# Altium PCB USB-C Power.PcbDoc
Units mil, origin at the board's own origin, x right, y up, seen from the top; angles counter-clockwise.
Board outline 1025 x 575 mil, 2 copper layers (Top Layer, Bottom Layer); 39 components, 19 nets, 112 pads, 66 vias.
Unrouted connection lines stored in the file: 4.
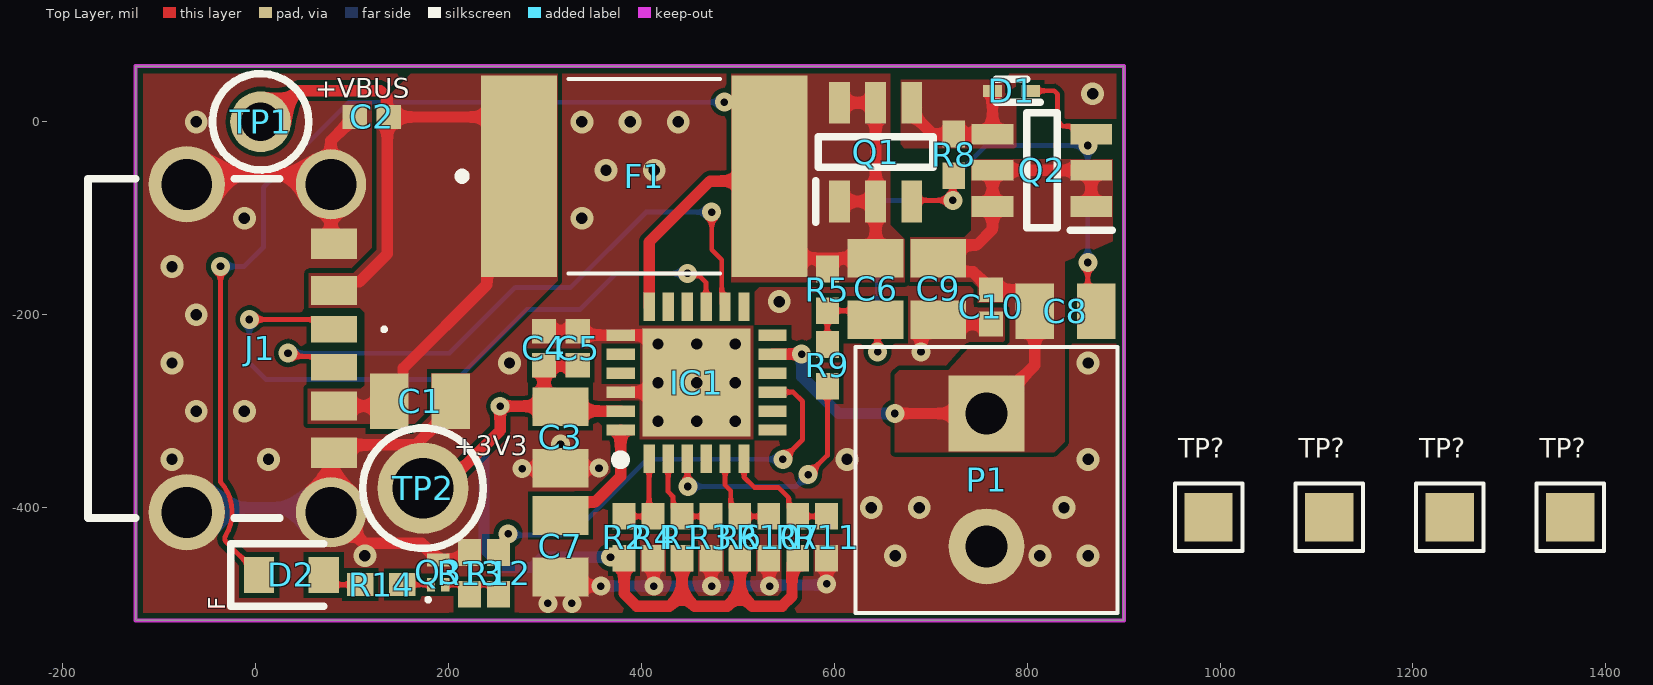
[diagram p0: Top Layer view]
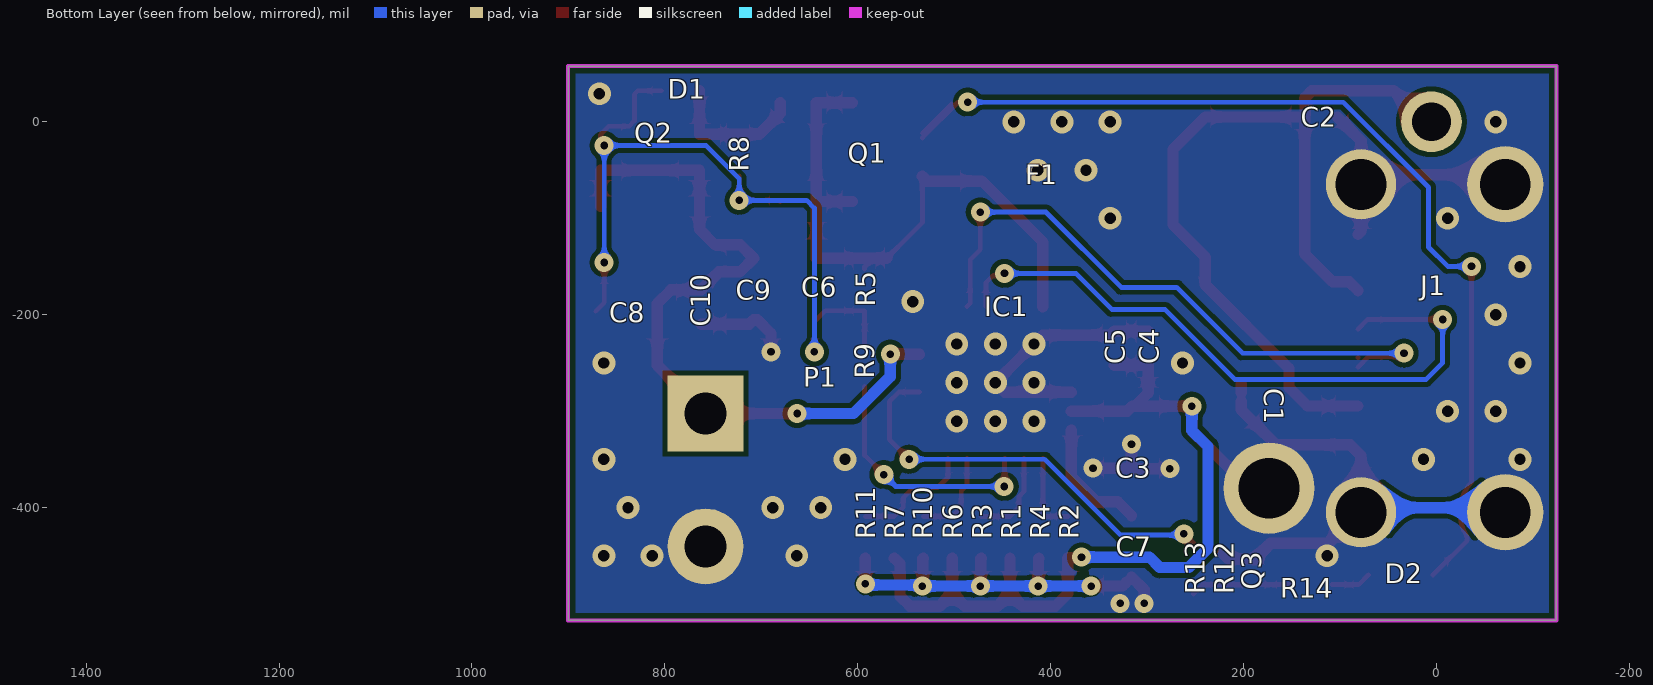
[diagram p1: Bottom Layer view, seen from below]

## Layer stack, top to bottom
Top Solder: solder mask 0.4, Solder Resist, Dk 3.5
Top Layer: signal copper 1.4
Dielectric 1: dielectric 12.6, FR-4, Dk 4.8
Bottom Layer: signal copper 1.4
Bottom Solder: solder mask 0.4, Solder Resist, Dk 3.5

## Board outline
-124.6,-517.17 -124.6,57.83 900.4,57.83 900.4,-517.17

## Design rules (kind name [scope] priority, off if disabled: settings)
BoardOutlineClearance [All] p1: gap=7.87 ignorepadtopadclearanceinfootprint=FALSE
Clearance [All] p1: gap=5 ignorepadtopadclearanceinfootprint=FALSE except(9.84: Arc-Hole Track-Hole SMDPad-Hole THPad-Hole Via-Hole Fill-Hole Poly-Hole Region-Hole Text-Hole)
ComponentClearance [All] p1: gap=5 collisioncheckmode=3 verticalgap=5 showdistances=TRUE
DiffPairsRouting [All] p1: maxlimit=10 minlimit=5 mostfreqgap=5 toplayer_minwidth=5 toplayer_maxwidth=1000 toplayer_prefwidth=5 bottomlayer_minwidth=5 bottomlayer_maxwidth=1000 bottomlayer_prefwidth=5 maxuncoupledlength=500
Height [All] p1: minheight=0 maxheight=71497.94 prefheight=500
HoleSize [All] p1: absolutevalues=TRUE maxlimit=248.03 minlimit=7.87 maxpercent=80.000 minpercent=20.000
HoleToHoleClearance [All] p1: gap=9.84 allowstackedmicrovias=FALSE
MinimumAnnularRing [All] p1: minimumring=5.12
MinimumSolderMaskSliver [All] p1: minsoldermaskwidth=0
PlaneClearance [All] p1: clearance=5
PlaneConnect PlaneConnectPowerPads [InNet('+VBUS') Or InNet('+5V') Or InNet('+3V3') Or InNet('GND') Or InNet('+VBUS_F') Or InNet('POWER_MOS_DS') Or InNet('+V_out')] p1: planeconnectstyle=Direct reliefexpansion=20 reliefentries=4 reliefconductorwidth=10 reliefairgap=10
PlaneConnect [All] p2: pad.planeconnectstyle=Relief pad.reliefexpansion=11.81 pad.reliefentries=4 pad.reliefconductorwidth=5 pad.reliefairgap=5 via.planeconnectstyle=Direct via.reliefexpansion=11.81 via.reliefentries=4 via.reliefconductorwidth=5 via.reliefairgap=5
PolygonConnect PolygonConnectPowerPads [InNet('+VBUS') Or InNet('+5V') Or InNet('+3V3') Or InNet('GND') Or InNet('+VBUS_F') Or InNet('POWER_MOS_DS') Or InNet('+V_out')] p1: connectstyle=Direct reliefconductorwidth=10 reliefentries=4 polygonreliefangle="90 Angle" airgapwidth=10
PolygonConnect [All] p2: thpad.connectstyle=Relief thpad.reliefconductorwidth=5 thpad.reliefentries=4 thpad.polygonreliefangle="90 Angle" thpad.airgapwidth=5 smdpad.connectstyle=Relief smdpad.reliefconductorwidth=5 smdpad.reliefentries=4 smdpad.polygonreliefangle="90 Angle" smdpad.airgapwidth=5 via.connectstyle=Direct via.reliefconductorwidth=5 via.reliefentries=4 via.polygonreliefangle="90 Angle" via.airgapwidth=5
RoutingVias [All] p1: holewidth=11.81 width=23.62 viastyle="Through Hole" minholewidth=7.87 minwidth=13.78 maxholewidth=23.62 maxwidth=259.84
SilkToSilkClearance [All] p1: silktosilkclearance=0
SilkToSolderMaskClearance [IsPad] p1: minsilkscreentomaskgap=5.91 clearancetoexposedcopper=TRUE
SolderMaskExpansion [All] p1: expansion=2.95 istentingtop=FALSE
Width [All] p1: maxlimit=1000 minlimit=5 preferedwidth=5 minimp=50.000000 maximp=50.000000 favimp=50.000000
20 further rules are at their usual default settings.

## Classes and differential pairs
component class "USB-C Power": C1 C2 C3 C4 C5 C6 C7 C8 C9 C10 D1 D2 F1 IC1 J1 P1 Q1 Q2 Q3 R1 R2 R3 R4 R5 R6 R7 R8 R9 R10 R11 R12 R13 R14 TP1 TP2 TP?

## Components (designator, comment, footprint, x,y, rotation, side; value= is the part's Value field where it differs from the comment)
C1 "10u/25V" 0805_CAP 115.4,-254.88 r0 top
C2 "100n/50V" 0402_CAP 150.28,-15 r180 top
C3 "1u/25V" 0805_CAP 350.99,-272.36 r270 top
C4 "100n/50V" 0402_CAP 278.83,-264.84 r90 top
C5 "100n/50V" 0402_CAP 313.83,-264.84 r90 top
C6 "1u/25V" 0805_CAP 677.84,-118.36 r270 top
C7 "1u/25V" 0805_CAP 280.99,-495.28 r90 top
C8 "1u/25V" 0805_CAP 784.74,-161.47 r0 top
C9 "10u/25V" 0805_Cap 742.84,-118.36 r270 top
C10 "100n/50V" 0402_CAP 782.38,-162.07 r270 top
D1 "22V/100mW" SOD-923-2 783.75,32.12 r180 top
D2 "Yellow/54mW" 0603_LED -28.14,-435 r0 top
F1 "24V/7A" 2920_PTC 402.92,-56.47 r0 top locked
IC1 "CYPD3177-24LQXQT" QFN-24 457.13,-270.47 r90 top
J1 "Type-C Power Header" TYPE-C_6_FEMALE 78,-64.84 r270 top locked
P1 "V_Output" KF350-2P 757.84,-371.47 r180 top locked
Q1 "40V/6.9A" TSOP-6 642.84,-31.47 r90 top
Q2 "40V/6.9A" TSOP-6 815.25,-50.29 r180 top
Q3 "TNM3K60FE" CST3-3 189.18,-467.2 r0 top
R1 "5.1K/62.5mW" 0402_RES 421.98,-475.87 r90 top
R2 "5.1K/62.5mW" 0402_RES 361.98,-475.87 r90 top
R3 "10K/62.5mW" 0402_RES 491.98,-385.87 r270 top
R4 "2.4K/62.5mW" 0402_RES 431.98,-385.87 r270 top
R5 "10K/62.5mW" 0402_RES 612.84,-129.3 r270 top
R6 "0R" 0402_RES 481.98,-475.87 r90 top
R7 "0R" 0402_RES 541.98,-475.87 r90 top
R8 "49.9K/62.5mW" 0402_RES 703.84,-79.3 r90 top
R9 "1K/62.5mW" 0402_RES 572.85,-297.61 r90 top
R10 "DNP" 0402_RES 551.98,-385.87 r270 top
R11 "DNP" 0402_RES 611.98,-385.87 r270 top
R12 "1K/62.5mW" 0402_RES 271.66,-423.35 r270 top
R13 "150K/62.5mW" 0402_Res 201.66,-513.35 r90 top
R14 "150K/62.5mW" 0402_Res 175.05,-500 r180 top
TP1 "Red/Small" TestPoint_small 5,0 r0 top
TP2 "white/Small" TestPoint_big 173.47,-380 r0 top
TP? "SMD_Point" TestPoint_SMD 1238.17,-410.14 r0 top
TP? "SMD_Point" TestPoint_SMD 1113.17,-410.14 r0 top
TP? "SMD_Point" TestPoint_SMD 1363.17,-410.14 r0 top
TP? "SMD_Point" TestPoint_SMD 988.17,-410.14 r0 top

## Footprints (in the part's own frame and the unit in brackets; to place one, negate y for a bottom-side part, rotate by r counter-clockwise, add the part's x,y. Pads: shape width x height; smd on the part's side, far side on the other; paste and mask are expansions set on the pad)
0402_CAP [mm]
  rect 0.65x0.64 smd: 1(0.312,-0.508) 2(1.212,-0.508)
  body extent 0.26,-0.76 1.26,-0.26, height 0.56
0402_RES [mm]
  rect 0.7x0.6 smd: 1(0.593,-0.508) 2(1.693,-0.508)
  body extent 0.64,-0.76 1.64,-0.26, height 0.35
0402_Res [mm]
  rect 0.7x0.6 smd: 1(0.593,-0.508) 2(1.693,-0.508)
  body extent 0.64,-0.76 1.64,-0.26, height 0.35
0603_LED [mm]
  rect 0.8x0.95 smd: 1(0.801,-0.889) 2(2.501,-0.889)
  silkscreen extent 0.05,-1.71 2.5,-0.06, body extent 0.83,-1.29 2.43,-0.49, height 0.58
0805_CAP [mm]
  rect 1.02x1.47 smd: 1(0.587,-0.889) 2(2.207,-0.889)
  body extent 0.39,-1.51 2.4,-0.26, height 1.52
0805_Cap [mm]
  rect 1.02x1.47 smd: 1(0.587,-0.889) 2(2.207,-0.889)
  body extent 0.39,-1.51 2.4,-0.26, height 1.52
2920_PTC [mm]
  rect 2x5.3 smd: 1(-3.3,0) 2(3.3,0)
  silkscreen extent -4.9,-2.56 2,2.56, body extent -3.67,-2.57 3.67,2.57, height 2.5
CST3-3 [mm]
  rect 0.22x0.35 smd: 1(-0.19,-0.325) 2(0.19,-0.325)
  rect 0.6x0.35 smd: 3(0,0.325)
  silkscreen extent -0.32,-0.77 -0.22,-0.67, body extent -0.3,-0.5 0.3,0.5, height 0.5
KF350-2P [mm]
  rect 2x2 hole 1.1: 1(0,-1.75)
  round 2 hole 1.1: 2(0,1.75)
  silkscreen extent -3.45,-3.5 3.45,3.5, body extent -3.37,-3.65 3.43,3.65, height 8.41
QFN-24 [mm]
  rect 0.75x0.3 smd: 1(-2,1.25) 2(-2,0.75) 3(-2,0.25) 4(-2,-0.25) 5(-2,-0.75) 6(-2,-1.25) 13(2,-1.25) 14(2,-0.75) 15(2,-0.25) 16(2,0.25) 17(2,0.75) 18(2,1.25)
  rect 0.3x0.75 smd: 7(-1.25,-2) 8(-0.75,-2) 9(-0.25,-2) 10(0.25,-2) 11(0.75,-2) 12(1.25,-2) 19(1.25,2) 20(0.75,2) 21(0.25,2) 22(-0.25,2) 23(-0.75,2) 24(-1.25,2)
  rect 2.85x2.85 smd: 25(0,0)
  silkscreen extent -2.16,1.88 -1.91,2.13, body extent -2.05,-2.05 2.05,2.05, height 0.6
SOD-923-2 [mm]
  rect 0.51x0.32 smd: 1(-0.5,0) 2(0.5,0)
  silkscreen extent -0.76,-0.3 0.4,0.3, body extent -0.5,-0.3 0.5,0.3, height 0.4
TestPoint_big [mm] "Length: 11.3 mm Outside Diameter: 3.17 mm"
  round 2.4 hole 1.6: 1(0,0)
  silkscreen extent -1.59,-1.59 1.59,1.59, body extent -1.6,-1.6 1.6,1.6, height 8.13
TestPoint_small [mm] "Length: 7.62 mm Outside Diameter: 2.54 mm"
  round 1.6 hole 1.02: 1(0,0)
  silkscreen extent -1.27,-1.27 1.27,1.27, body extent -1.26,-1.27 1.27,1.27, height 4.82
TestPoint_SMD [mil] "Diameter: 1.27 mm"
  rect 50x50 smd: 1(0,0)
  silkscreen extent -35,-35 35,35
TSOP-6 [mm]
  rect 1.1x0.55 smd: 1(-1.3,0.95) 2(-1.3,0) 3(-1.3,-0.95) 4(1.3,-0.95) 5(1.3,0) 6(1.3,0.95)
  silkscreen extent -1.85,-1.51 0.4,1.58, body extent -1.42,-1.51 1.42,1.51, height 1.1
TYPE-C_6_FEMALE [mm] "5A 1 Surface Mount 6 Female -25℃~+85℃ Type-C SMD  USB Connectors ROHS"
  rect 0.7x1.2 smd: A5(3.82,0.08) B5(4.82,0.08)
  rect 0.76x1.2 smd: A9(5.84,0.08) B9(2.8,0.08)
  rect 0.8x1.2 smd: A12(7.07,0.08) B12(1.57,0.08)
  round 1.85 hole 1.34: MH(0,0) MH(8.64,0)
  round 2.01 hole 1.34: MH(0,-3.8) MH(8.64,-3.8)
  silkscreen extent -0.15,-6.4 8.79,1.45, body extent -0.15,-6.19 8.79,0.71, height 3.25

## Part data
C1 C9: library part Cap, "25V 10uF X5R - Multilayer Ceramic Capacitors MLCC - SMD/SMT ROHS", Mfr.="Murata Electronics", Mfr. #=GRM21BR61E106KA73K, Datasheet=https://jlcpcb.com/parts/2nd/Capacitors/Multilayer_Ceramic_Capacitors_MLCC_SMD_SMT_33, Distributor #=C3909351, Distributor_Link=https://jlcpcb.com/partdetail/4477883-GRM21BR61E106KA73K/C3909351
C2 C4 C5 C10: library part Cap, "16V 100nF -20%~+80% 0402  Multilayer Ceramic Capacitors MLCC - SMD/SMT ROHS", Mfr.="FH (Guangdong Fenghua Advanced Tech)", Mfr. #=0402F104Z160NT, Datasheet=https://datasheet.lcsc.com/lcsc/2202131930_FH--Guangdong-Fenghua-Advanced-Tech-0402F104Z160NT_C2838746.pdf, Distributor #=C2838746, Distributor_Link=https://jlcpcb.com/partdetail/3013916-0402F104Z160NT/C2838746
C3 C6 C7 C8: library part Cap, "25V 1uF Y5V ±20% 0805  Multilayer Ceramic Capacitors MLCC - SMD/SMT ROHS", Mfr.="FH (Guangdong Fenghua Advanced Tech)", Mfr. #=0805F105M250NT, Datasheet=https://datasheet.lcsc.com/lcsc/1810311214_FH--Guangdong-Fenghua-Advanced-Tech-0805F105M250NT_C89378.pdf, Distributor #=C89378, Distributor_Link=https://jlcpcb.com/partdetail/90558-0805F105M250NT/C89378
D1: library part Diode_Zener, "Zener Diodes CDZV22B is the 100mW type compact (1006 size) diode for voltage regulation.", Mfr.="ROHM Semiconductor", Mfr. #=CDZVT2R22B, Datasheet=https://www.rohm.com/datasheet?p=CDZV22B&dist=Mouser&media=referral&source=mouser.com&campaign=Mouser, Distributor #=755-CDZVT2R22B, Distributor_Link=https://www.mouser.tw/ProductDetail/ROHM-Semiconductor/CDZVT2R22B?qs=4v%252BiZTmLVHG6BDwFzUsoYg%3D%3D
D2: library part LED, "590nm~590nm yellow 54mW 0603  Light Emitting Diodes (LED) ROHS", Mfr.="ROHM Semicon", Mfr. #=SML-D12Y8WT86R, Datasheet=https://datasheet.lcsc.com/lcsc/2006151335_ROHM-Semicon-SML-D12Y8WT86R_C600870.pdf, Distributor #=C600870, Distributor_Link=https://jlcpcb.com/partdetail/RohmSemicon-SMLD12Y8WT86R/C600870
F1: library part PTC, "Resettable Fuses - PPTC PTC SMD RESETTABLE FUSE", Mfr.=Littelfuse, Mfr. #=2920L700/24SLER, Datasheet=https://www.mouser.tw/datasheet/2/240/littelfuse_ptc_low_rho_datasheet_pdf-2956203.pdf, Distributor #=576-2920L700/24SLER, Distributor_Link=https://www.mouser.tw/ProductDetail/Littelfuse/2920L700-24SLER?qs=7MVldsJ5UazQEVth1QGslQ%3D%3D
IC1: library part CYPD3177-24LQXQ, "USB Interface IC USB Type-C port controller CYPD3177", Mfr.="Infineon Technologies", Datasheet=https://www.mouser.tw/datasheet/2/196/Infineon_EZ_PD_BCR_Datasheet_USB_Type_C_Port_Contr-3161917.pdf, Distributor #=727-CYPD3177-24LQXQT, Distributor_Link=https://www.mouser.tw/ProductDetail/727-CYPD3177-24LQXQT, Mfr. #=CYPD3177-24LQXQT
J1: library part Type-C_6_Female, "5A 1 Surface Mount 6 Female -25℃~+85℃ Type-C SMD USB Connectors ROHS", Mfr.=DEALON, Mfr. #=USB-TYPE-C-010, Datasheet=https://datasheet.lcsc.com/lcsc/2201121330_DEALON-USB-TYPE-C-010_C2927030.pdf, Distributor #=C2927030, Distributor_Link=https://jlcpcb.com/partdetail/Dealon-USB_TYPE_C010/C2927030
P1: library part Header_2x1, "10A -40℃~+105℃ 300V Green 18~24 Straight pin 3.5mm 0.75 1 2 Plugin,P=3.5mm  Screw terminal ROHS", Mfr.="Cixi Kefa Elec", Mfr. #=KF350-3.5-2P, Datasheet=https://datasheet.lcsc.com/lcsc/2303171000_Cixi-Kefa-Elec-KF350-3-5-2P_C474892.pdf, Distributor #=C474892, Distributor_Link=https://jlcpcb.com/partdetail/Cixi_KefaElec-KF350_3_52P/C474892
Q1 Q2: library part MOSFET_P_1, "MOSFET P Ch -40Vds 20Vgs AEC-Q101 Qualified", Mfr.="Vishay Semiconductors", Mfr. #=SQ3419EV-T1_GE3, Datasheet=https://www.vishay.com/doc?68210, Distributor #=78-SQ3419EV-T1_GE3, Distributor_Link=https://www.mouser.tw/ProductDetail/Vishay-Semiconductors/SQ3419EV-T1_GE3?qs=Vcr9%2FL0R50hjQdrP75bU0Q%3D%3D&gclid=CjwKCAjwg-GjBhBnEiwAMUvNW2_QHlpdOmMyQk5t1a0eb3FLtCoKgaDvyU_lKGTsS4lC8mEsJurJAhoCUjcQAvD_BwE
Q3: library part MOSFET_N, "60V 0.3A 2Ω@10V SOT-523  MOSFETs ROHS", Mfr.=Toshiba, Mfr. #=SSM3K72KCT,L3F, Datasheet=https://www.mouser.tw/datasheet/2/408/SSM3K72KCT_datasheet_en_20201124-1099204.pdf, Distributor #=757-SSM3K72KCTL3F, Distributor_Link=https://www.mouser.tw/ProductDetail/757-SSM3K72KCTL3F
R1 R2: library part Res, "62.5mW ±1% 5.1kΩ 0402  Chip Resistor - Surface Mount ROHS", Mfr.=Sunway, Mfr. #=SC0402F5101F2ANRH, Datasheet=https://datasheet.lcsc.com/lcsc/2207281800_Sunway-SC0402F5101F2ANRH_C3152095.pdf, Distributor #=C3152095, Distributor_Link=https://jlcpcb.com/partdetail/Sunway-SC0402F5101F2ANRH/C3152095
R3 R4 R5: library part Res, "62.5mW Thick Film Resistors ±100ppm/℃ ±5% 10kΩ 0402  Chip Resistor - Surface Mount ROHS", Mfr.="Viking Tech", Mfr. #=CR-02JA6---10K, Datasheet=https://datasheet.lcsc.com/lcsc/2111241930_Viking-Tech-CR-02JA6---10K_C2924170.pdf, Distributor #=C2924170, Distributor_Link=https://jlcpcb.com/partdetail/VikingTech-CR_02JA6_10K/C2924170
R6 R7: library part Res, "62.5mW ±300ppm/℃ ±5% 0Ω 0402 Chip Resistor - Surface Mount ROHS", Mfr.=Sunway, Mfr. #=SC0402J0000I2ANRH, Datasheet=https://datasheet.lcsc.com/lcsc/2207281800_Sunway-SC0402J0000I2ANRH_C3152098.pdf, Distributor #=C3152098, Distributor_Link=https://jlcpcb.com/partdetail/Sunway-SC0402J0000I2ANRH/C3152098
R8: library part Res, "62.5mW Thick Film Resistors ±1% 49.9kΩ 0402  Chip Resistor - Surface Mount ROHS", Mfr.="LIZ Elec", Mfr. #=CR0402FF4992G, Datasheet=https://datasheet.lcsc.com/lcsc/1810170232_LIZ-Elec-CR0402FF4992G_C100457.pdf, Distributor #=C100457, Distributor_Link=https://jlcpcb.com/partdetail/LizElec-CR0402FF4992G/C100457
R9 R12: library part Res, "63mW ±5% 1kΩ 0402  Chip Resistor - Surface Mount ROHS", Mfr.="Ever Ohms Tech", Mfr. #=CR0402J1K00Q10Z, Datasheet=https://datasheet.lcsc.com/lcsc/2010191904_Ever-Ohms-Tech-CR0402J1K00Q10Z_C881213.pdf, Distributor #=C881213, Distributor_Link=https://jlcpcb.com/partdetail/Ever_OhmsTech-CR0402J1K00Q10Z/C881213
R10 R11: library part Res, Mfr.=N/A, Datasheet=N/A, Distributor #=N/A, Distributor_Link=N/A, Mfr. #=N/A
R13 R14: library part Res, "62.5mW Thick Film Resistors ±100ppm/℃ ±5% 150kΩ 0402 Chip Resistor - Surface Mount ROHS", Mfr.="Viking Tech", Mfr. #=ARG03FTC1503, Datasheet=https://datasheet.lcsc.com/lcsc/1912111437_Viking-Tech-CR-02JL6--150K_C409708.pdf, Distributor #=C409708, Distributor_Link=https://jlcpcb.com/partdetail/VikingTech-ARG03FTC1503/C409708
TP1 TP2: library part Test_Point, "General test point"
TP? TP? TP? TP?: library part Test_Point, "General test point", Mfr.=N/A, Datasheet=N/A, Distributor #=N/A, Distributor_Link=N/A, Mfr. #=N/A

## Via types
v1: diameter 23.62, hole 11.81, Top Layer to Bottom Layer, tented both sides, 37 vias
v2: diameter 19.68, hole 7.87, Top Layer to Bottom Layer, tented both sides, 29 vias

## Nets (pads, with @x,y where several pads share a name; then routed paths per layer and width w, separated by ;. In a path a pad name is that pad's centre, name@x,y a point inside that pad or via, vN(x,y) a via of type N, cw(c..) or ccw(c..) an arc to the next point about the centre after c; other vN are vias at no path point)
+3V3: C3.1 C4.1 C5.1 IC1.23 R1.1 R2.1 R6.1 R7.1 TP2.1 | length 992
  Top Layer w11.81: TP2.1@188.47,-375 198.47,-375 253.47,-320 v2@253.47,-295.86 ; v2(253.47,-295) C3.1@312.53,-295 ; C5.1 C4.1 298.83,-281.3 C3.1@312.53,-295 ; v2(367.84,-451.47) 368.37,-451.99 381.45,-451.99 R2.1 381.98,-489.21 394.98,-502.22 428.97,-502.22 441.98,-489.21 ; IC1.23 320.52,-300 315.52,-295 C3.1@312.53,-295 ; R1.1 441.98,-489.21 ; R6.1 501.98,-489.21 ; R7.1 556.07,-458.43 556.07,-491.98 545.83,-502.22 514.98,-502.22 501.98,-489.21 ; 441.98,-489.21 454.98,-502.22 488.97,-502.22 501.98,-489.21
  Bottom Layer w11.81: v2(253.47,-295) 253.47,-320 236.66,-336.81 236.66,-442.2 256.71,-462.26 286.71,-462.26 297.5,-451.47 v2(367.84,-451.47)
+V_out: C8.1 C9.1 C10.1 IC1.11 P1.1 Q2.1 Q2.2 Q2.5 Q2.6 | length 785.1
  Top Layer w11.81: IC1.11 v2(566.19,-240.95) ; v2(662.77,-302.56) P1.1 ; P1.1 807.84,-252.57 C8.1 807.84,-188.52 793.67,-174.35 C10.1 762.38,-174.15 743.87,-155.64 722.02,-155.64 C9.1 721.66,-127.65 747.84,-127.65 764.07,-111.43 Q2.6 Q2.5 Q2.2 Q2.1
  Bottom Layer w11.81: v2(566.19,-240.95) 566.19,-264.3 604.45,-302.56 v2(662.77,-302.56)
+VBUS: C1.1 C2.1 F1.1 J1.A9 J1.B9 TP1.1 | length 918.3
  Top Layer w11.81: TP1.1@-10,5 TP1.1@1,5 ; TP1.1@3,5 16.85,5 44.06,32.21 128.99,32.21 135.91,25.29 135.91,7.09 C2.1 ; J1.A9 133.63,-294.76 152.69,-275.71 152.69,-255.79 239.54,-168.93 239.54,-140.24 273,-106.77 F1.1 273,-28.46 239.54,5 C2.1 ; J1.B9 90.2,-166.02 107.37,-166.02 136.39,-137.01 136.39,3.39 C2.1
+VBUS_F: C6.1 D2.1 F1.2 IC1.18 Q1.1 Q1.2 Q1.5 Q1.6 R5.1 | length 1718.8
  Top Layer w5: v2(-36.61,-150) -36.61,-373.53 cw(c-71.61,-405) -31.53,-429.69 ccw(c-27.26,-432.28) -32,-433.85 -31.63,-434.97 -30.79,-435.81 D2.1 ; v2(485.99,20.34) 495.97,20.34 532.84,-16.53 F1.2@532.84,-17.16 ; F1.2@502.44,18.53 F1.2@532.84,-11.87 ; F1.2 532.84,-104.5 F1.2@569.71,-141.37 ; R5.1@583.63,-141.47 592.84,-150.68 R5.1
  Top Layer w11.81: IC1.18 407.92,-124.69 471.14,-61.47 527.84,-61.47 F1.2 ; F1.2@569.71,-141.37 569.81,-141.47 583.63,-141.47 C6.1 Q1.2 ; Q1.1 Q1.2 ; Q1.6 Q1.5 Q1.2
  Bottom Layer w5: v2(-36.61,-150) -12,-150 8,-130 8,-68 96.34,20.34 v2(485.99,20.34)
CC1: IC1.15 J1.A5 | length 692.3
  Top Layer w5: v2(-6.61,-205) 70.91,-205 J1.A5 ; v2(447.77,-157.25) 450.2,-159.68 459.87,-159.68 466.98,-166.78 IC1.15
  Bottom Layer w5: v2(-6.61,-205) -6.61,-250 10.74,-267.34 208.57,-267.34 281.15,-194.76 336.15,-194.76 373.66,-157.25 v2(447.77,-157.25)
CC2: IC1.14 J1.B5 | length 658.1
  Top Layer w5: v2(33.39,-240) 37.37,-240 40.69,-243.33 69.87,-243.33 J1.B5 ; J1.B5@80.87,-244.33 J1.B5@81.15,-244.61 ; v2(472.84,-93.65) 472.84,-132.65 483.26,-143.06 483.26,-188.33 IC1.14
  Bottom Layer w5: v2(33.39,-240) 200.76,-240 269.06,-171.69 326.66,-171.69 404.71,-93.65 v2(472.84,-93.65)
FAULT: IC1.9 R12.1 | length 439.9
  Top Layer w5: R12.1@251.66,-436.69 259.69,-436.69 260.97,-435.41 260.97,-428 v2(261.71,-427.26) ; IC1.9 557.29,-280.32 566.98,-290 566.98,-329.68 v2(546.66,-350)
  Bottom Layer w5: v2(261.71,-427.26) 263.12,-428.66 327.25,-428.66 405.91,-350 v2(546.66,-350)
FAULT_FET_D: Q3.1 R14.1 | length 30
  Top Layer w5: R14.1 Q3.1
FAULT_FET_G: Q3.2 R12.2 R13.1 | length 59.5
  Top Layer w5: Q3.2 242.35,-480 251.66,-489.31 R12.2
FAULT_LED_K: D2.2 R14.2 | length 42.2
  Top Layer w5: D2.2 80.32,-480 R14.2
GND: C1.2 C2.2 C3.2 C4.2 C5.2 C7.1 C9.2 C10.2 IC1.19 IC1.22 IC1.25 J1.A12 J1.B12 J1.MH P1.2 Q3.3 R3.2 R4.2 R10.2 R11.2 R13.2 | length 1716.9
  Top Layer w11.81: J1.MH@-71.61,-54.84 J1.MH@78,-54.84 ; J1.B12@81.15,-116.65 78,-113.5 78,-64.84 J1.MH@78,-54.84 ; J1.MH@83,-385.46 J1.MH@78,-385.46 ; C2.2 77.78,-19.78 77.78,-54.63 J1.MH@78,-54.84 ; C1.2@202.21,-280.98 C1.2@202.21,-272.13 ; C1.2 202.29,-298.74 166.03,-335 89.34,-335 J1.A12 78,-346.34 J1.MH@78,-385.46 ; R13.2 221.66,-447.52 215.76,-453.43 190.17,-453.43 Q3.3 184.26,-454.41 183.28,-453.43 183.28,-448.5 172.03,-437.26 112.52,-437.26 80.26,-405 78,-405 J1.MH@78,-385.46 ; v2(276.15,-359.76) 315.48,-359.76 C3.2 ; C4.2 C5.2 337.96,-221.26 IC1.19 407.92,-221.26 v1(417.13,-230.47) v1(457.13,-270.47) 447.29,-280.32 IC1.22 ; v2(302.84,-499.45) 302.84,-485.31 C7.1 ; v2(315.99,-334.25) C3.2 ; C7.1@321.35,-477.52 325.29,-481.47 v2(357.84,-481.47) ; v2(355.99,-359.25) C3.2 ; R4.2 412.41,-452.95 412.41,-481.03 v2(412.84,-481.47) ; R3.2 472.41,-452.95 472.41,-481.03 v2(472.84,-481.47) ; R10.2 532.41,-452.95 532.41,-481.03 v2(532.84,-481.47) ; v2(591.98,-479.21) R11.2 ; v2(689.84,-238.65) 689.84,-219.42 704.02,-205.25 C9.2 712.38,-209.78 C10.2
  Bottom Layer w11.81: J1.MH@-56.61,-400.16 J1.MH@93,-400.16 ; v2(357.84,-481.47) v2(412.84,-481.47) v2(472.84,-481.47) v2(532.84,-481.47) 533.97,-480.34 590.85,-480.34 v2(591.98,-479.21)
  other v1: 113.17,-450.14 663.17,-450.14 813.17,-450.14 863.17,-450.14 638.17,-400.14 688.17,-400.14 838.17,-400.14 -86.83,-350.14 13.17,-350.14 613.17,-350.14 863.17,-350.14 417.13,-310.47 457.13,-310.47 497.13,-310.47 -61.83,-300.14 -11.83,-300.14 417.13,-270.47 497.13,-270.47 -86.83,-250.14 263.17,-250.14 863.17,-250.14 457.13,-230.47 497.13,-230.47 -61.83,-200.14 542.84,-186.47 -86.83,-150.14 -11.83,-100.14 338.17,-100.14 363.17,-50.14 413.17,-50.14 -61.83,-0.14 338.17,-0.14 388.17,-0.14 438.17,-0.14 867.84,29.04
  other v2: 327.84,-499.45
ISNK_CRS: IC1.5 R6.2 R10.1 TP?.1@1113.17,-410.14 | length 96.3
  Top Layer w5: IC1.5 486.66,-376.7 492.67,-382.71 492.67,-399.9 R6.2 R10.1
ISNK_FIN: IC1.6 R7.2 R11.1 TP?.1@988.17,-410.14 | length 127.7
  Top Layer w5: IC1.6 506.35,-368.58 516.98,-379.21 541.98,-379.21 552.67,-389.9 552.67,-399.9 R7.2 R11.1
PDC_VCCD: C7.2 IC1.24 | length 127.3
  Top Layer w11.81: C7.2 330.17,-394.21 351.98,-394.21 378.39,-367.8 IC1.24
POWER_MOS_DS: D1.2 Q1.4 Q2.4 R8.2 | length 148.7
  Top Layer w11.81: Q1.4 680.25,8.89 702.02,-12.88 Q2.4 D1.2
VBBUS_FET_G: C6.2 C8.2 D1.1 Q1.3 Q2.3 R5.2 R8.1 R9.2 | length 885.4
  Top Layer w5: R9.2 R5.2 633.55,-195.96 C6.2 644.84,-207.25 v2(644.84,-238.65) ; Q1.3 681.43,-81.47 v2(722.84,-81.47) R8.1@722.84,-55.96 ; D1.1 827.85,32.12 831.55,28.42 831.55,0.97 837.07,-4.56 858.1,-4.56 Q2.3 866.43,-21.03 v2(862.84,-24.62) ; v2(862.84,-145.96) 862.84,-187.69 C8.2
  Bottom Layer w5: v2(644.84,-238.65) 644.84,-89.47 652.84,-81.47 v2(722.84,-81.47) 722.84,-58.88 757.11,-24.62 v2(862.84,-24.62) v2(862.84,-145.96)
VBUS_FET_EN: IC1.3 R9.1 | length 259.2
  Top Layer w5: IC1.3 447.65,-349.57 447.65,-377.83 v2(448,-378.19) ; v2(572.85,-365.96) 592.85,-345.96 R9.1
  Bottom Layer w5: v2(448,-378.19) 560.61,-378.19 v2(572.85,-365.96)
VBUS_MAX: IC1.2 R1.2 R3.1 TP?.1@1363.17,-410.14 | length 96
  Top Layer w5: IC1.2 427.61,-383.58 432.67,-388.64 432.67,-399.9 R1.2 R3.1
VBUS_MIN: IC1.1 R2.2 R4.1 TP?.1@1238.17,-410.14 | length 91.7
  Top Layer w5: R2.2 R4.1 407.92,-405.16 IC1.1
pads on no net: IC1.4 IC1.7 IC1.8 IC1.10 IC1.12 IC1.13 IC1.16 IC1.17 IC1.20 IC1.21

## Polygon pours and split planes (outlines as drawn)
GND on Top Layer "GND_L01_P006" (solid, pour order 6): -124.6,57.83 -124.6,-517.17 900.4,-517.17 900.4,57.83
+VBUS on Top Layer "+VBUS_L01_P002" (solid, pour order 2): 313,50 160.77,50 125.48,14.71 125.48,-132.52 101,-157 55,-157 55,-193 108,-193 113,-198 113,-273 109,-277 54,-277 54,-313 165,-313 313,-165
+V_out on Top Layer "+V_OUT_L01_P005" (solid, pour order 5): 888.84,-38.65 741.84,-38.65 741.84,-112.65 734.84,-119.65 678.84,-119.65 678.84,-165.65 742.84,-165.65 748.84,-171.65 748.84,-187.65 776.84,-187.65 781.84,-192.65 781.84,-228.65 776.82,-233.67 739.69,-233.67 717.98,-257.88 667.36,-257.88 662.77,-262.48 662.77,-342.65 827.84,-342.65 838.8,-331.69 838.8,-145.21 888.84,-124.1
POWER_MOS_DS on Top Layer "POWER_MOS_DS_L01_P004" (solid, pour order 4): 668.84,-23.43 672.3,-27.65 786.84,-27.65 788.84,-25.65 788.84,18.35 776.84,30.35 776.84,40.35 773.84,43.35 668.84,43.35
+VBUS_F on Top Layer "+VBUS_F_L01_P003" (solid, pour order 3): 493,-166.47 673,-166.47 673,-121.62 658,-106.62 658,53.53 493,53.53
GND on Bottom Layer "GND_L02_P001" (solid, pour order 1): -124.6,57.83 -124.6,-517.17 900.4,-517.17 900.4,57.83

## Keep-outs
Keep-Out Layer:
  the board outline again, w3.94

## Silkscreen, mask and mechanical layers (free items; w line width, h text height)
Top Overlay:
  text "+VBUS" at 61.66,25 h20
  text "+3V3" at 205.55,-345.96 h20
  text "F" at -26.13,-506.42 h30 r90